# Altium PCB PCB_Motherboard.PcbDoc (part 2 of 2)
Units mm, origin at the board's own origin, x right, y up, seen from the top; angles counter-clockwise.
Board outline 110 x 216 mm, 2 copper layers (Top Layer, Bottom Layer); 105 components, 111 nets, 501 pads, 563 vias.
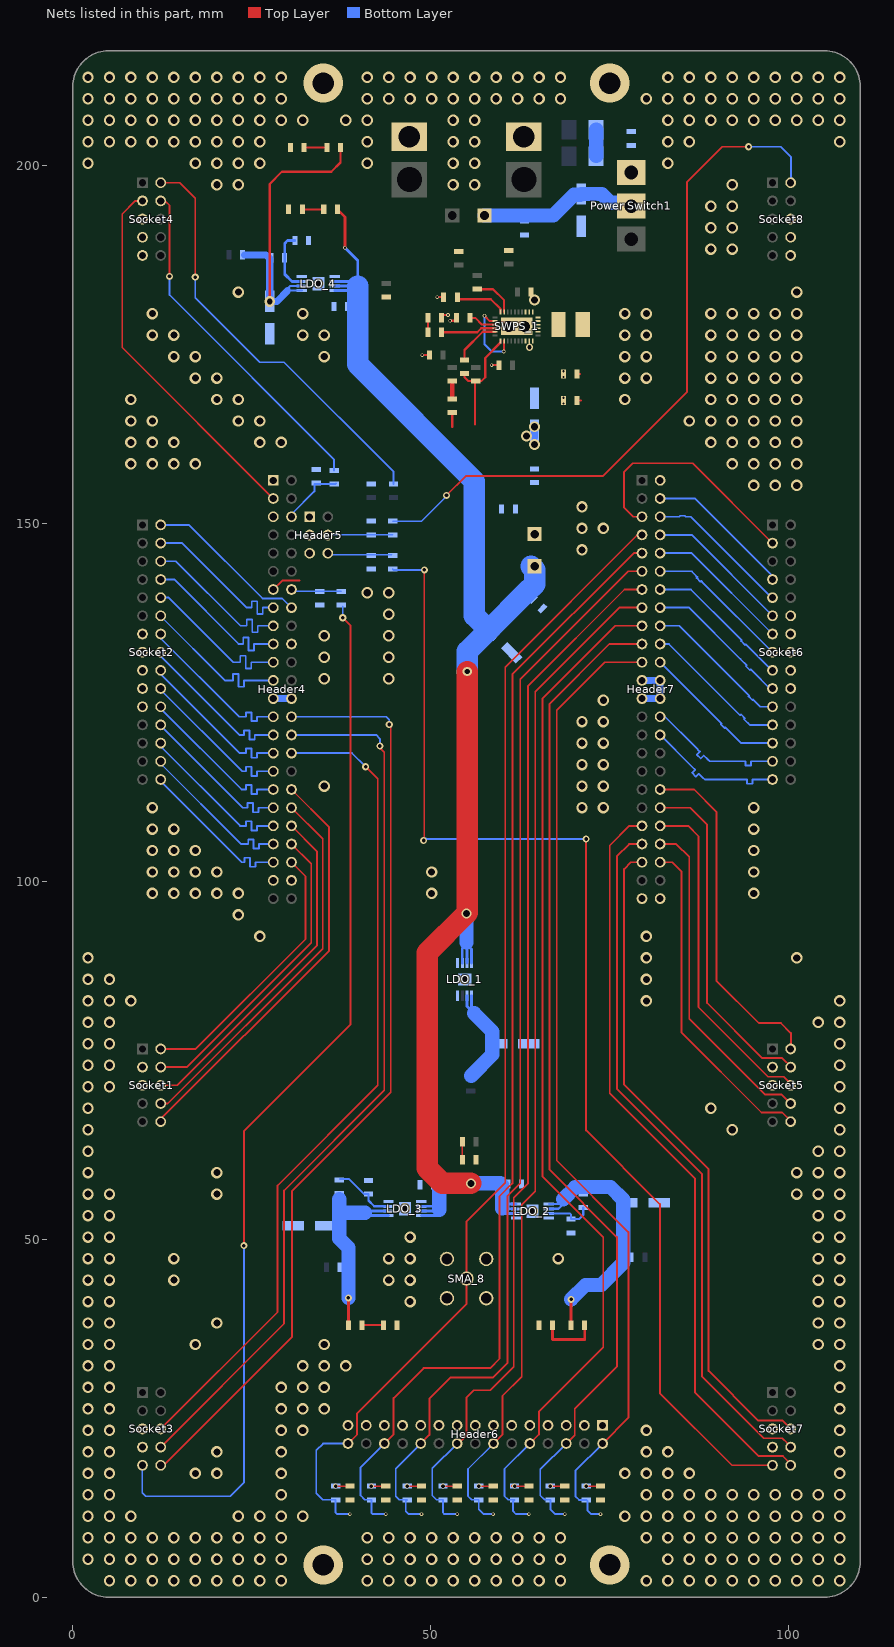
[diagram p2: the nets of this part, all layers, seen from the top]

## Via types
v1: diameter 1.6, hole 1, Top Layer to Bottom Layer, tented both sides, 493 vias
v2: diameter 0.5, hole 0.3, Top Layer to Bottom Layer, 20 vias
v3: diameter 1, hole 0.5, Top Layer to Bottom Layer, 15 vias
v4: diameter 1.4, hole 1, Top Layer to Bottom Layer, 12 vias
v5: diameter 0.7, hole 0.5, Top Layer to Bottom Layer, 8 vias
v6: diameter 1.5, hole 1, Top Layer to Bottom Layer, 6 vias
v7: diameter 5.5, hole 3, Top Layer to Bottom Layer, 4 vias
v8: diameter 2, hole 1.5, Top Layer to Bottom Layer, 2 vias
v9: diameter 1.27, hole 0.711, Top Layer to Bottom Layer, 1 vias
v10: diameter 1.5, hole 0.8, Top Layer to Bottom Layer, 1 vias
v11: diameter 1, hole 0.6, Top Layer to Bottom Layer, 1 vias

## Nets (pads, with @x,y where several pads share a name; then routed paths per layer and width w, separated by ;. In a path a pad name is that pad's centre, name@x,y a point inside that pad or via, vN(x,y) a via of type N, cw(c..) or ccw(c..) an arc to the next point about the centre after c; other vN are vias at no path point) (continued)
GND: C101.2 C102.2 C103.2 C104.2 C105.2 C106.2 C107.2 C108.2 C109.2 C110.1 C111.1 C112.1 C113.1 C114.2 C115.1 C116.1 C117.2 C119.2 C120.2 C121.1 C122.2 C123.1 C124.2 C125.1 C126.1 C127.2 C128.1 Conn_1.2 Conn_2.2 Header4.1 Header4.3 Header4.7 Header4.13 Header4.23 Header4.37 Header4.47 Header5.1 Header5.3 Header5.5 Header6.1 Header6.3 Header6.5 Header6.7 Header6.9 Header6.11 Header6.13 Header6.15 Header6.17 Header6.19 Header6.21 Header6.23 Header6.25 Header6.27 Header6.29 Header7.12 Header7.13 Header7.24 Header7.25 Header7.36 Header7.37 Header7.48 LDO_1.4 LDO_1.5 LDO_1.9 LDO_2.4 LDO_2.5 LDO_2.9 LDO_3.4 LDO_3.5 LDO_3.9 LDO_4.4 LDO_4.5 LDO_4.9 LED1.1 LED2.1 LED3.1 LED4.1 LED5.1 LED6.1 LED7.1 LED8.1 R96.2 R97.2 R98.2 R99.2 R101.1 R103.1 R105.1 R107.2 R111.2 R114.2 SMA_8.2 Socket1.3 Socket1.5 Socket2.13 Socket2.15 Socket2.17 Socket2.19 Socket2.21 Socket3.5 Socket3.7 Socket4.5 Socket4.7 Socket4.9 Socket5.3 Socket5.5 Socket6.12 Socket6.14 Socket6.16 Socket6.18 Socket6.20 Socket7.5 Socket7.7 Socket8.6 Socket8.8 Socket8.10 SWPS_1.8 SWPS_1.9 SWPS_1.10 SWPS_1.17 SWPS_1.18 SWPS_1.19 SWPS_1.33 | length 20.6
  Top Layer w0.254: Header4.7@28,140.76 29.24,142 31.7,142
  Top Layer w0.3: v2(48.8,173.5) R111.2@49.8,173.5 ; v2(50.9,181.6) R114.2@51.8,181.6 ; 51.9,179.1 v2(52.4,179.1) ; v2(52.7,178.3) 53.2,178.3 ; v2(58.5,172.1) C117.2@59.5,172.1
  Bottom Layer w0.8: v8(60.9,177.5) v8(63.1,177.5)
  Bottom Layer w1: Header4.7@27.84,140.76 Header4.7@28,140.76 ; Header4.13@28,125.52 Header4.37@30.54,125.52 ; Header7.13@79.5,125.52 Header7.37@82.04,125.52 Header7.36@82.04,128.06 Header7.12@79.5,128.06
  other v1: 5.121,2.296 8.121,2.296 11.121,2.296 14.121,2.296 17.121,2.296 20.121,2.296 23.121,2.296 26.121,2.296 29.121,2.296 41.121,2.296 44.121,2.296 47.121,2.296 50.121,2.296 53.121,2.296 56.121,2.296 59.121,2.296 62.121,2.296 65.121,2.296 68.121,2.296 80.121,2.296 83.121,2.296 86.121,2.296 89.121,2.296 92.121,2.296 95.121,2.296 98.121,2.296 101.121,2.296 104.121,2.296 107.121,2.296 2.121,5.296 5.121,5.296 8.121,5.296 11.121,5.296 14.121,5.296 17.121,5.296 20.121,5.296 23.121,5.296 26.121,5.296 29.121,5.296 41.121,5.296 44.121,5.296 47.121,5.296 50.121,5.296 53.121,5.296 56.121,5.296 59.121,5.296 62.121,5.296 65.121,5.296 68.121,5.296 83.121,5.296 86.121,5.296 89.121,5.296 92.121,5.296 95.121,5.296 98.121,5.296 101.121,5.296 104.121,5.296 107.121,5.296 2.121,8.296 5.121,8.296 8.121,8.296 11.121,8.296 14.121,8.296 17.121,8.296 20.121,8.296 23.121,8.296 26.121,8.296 29.121,8.296 41.121,8.296 44.121,8.296 47.121,8.296 50.121,8.296 53.121,8.296 56.121,8.296 59.121,8.296 62.121,8.296 65.121,8.296 68.121,8.296 80.121,8.296 83.121,8.296 86.121,8.296 89.121,8.296 92.121,8.296 95.121,8.296 98.121,8.296 101.121,8.296 104.121,8.296 107.121,8.296 2.121,11.296 5.121,11.296 8.121,11.296 23.121,11.296 26.121,11.296 29.121,11.296 32.121,11.296 77.121,11.296 80.121,11.296 83.121,11.296 86.121,11.296 89.121,11.296 92.121,11.296 95.121,11.296 98.121,11.296 101.121,11.296 104.121,11.296 107.121,11.296 2.121,14.296 5.121,14.296 29.121,14.296 80.121,14.296 83.121,14.296 86.121,14.296 89.121,14.296 92.121,14.296 95.121,14.296 98.121,14.296 101.121,14.296 104.121,14.296 107.121,14.296 2.121,17.296 5.121,17.296 17.121,17.296 20.121,17.296 29.121,17.296 77.121,17.296 80.121,17.296 83.121,17.296 86.121,17.296 107.121,17.296 2.121,20.296 5.121,20.296 20.121,20.296 29.121,20.296 80.121,20.296 83.121,20.296 107.121,20.296 2.121,23.296 5.121,23.296 29.121,23.296 32.121,23.296 80.121,23.296 107.121,23.296 2.121,26.296 5.121,26.296 29.121,26.296 32.121,26.296 35.121,26.296 107.121,26.296 2.121,29.296 5.121,29.296 29.121,29.296 32.121,29.296 35.121,29.296 107.121,29.296 2.121,32.296 5.121,32.296 32.121,32.296 35.121,32.296 38.121,32.296 107.121,32.296 2.121,35.296 5.121,35.296 17.121,35.296 35.121,35.296 104.121,35.296 107.121,35.296 2.121,38.296 5.121,38.296 20.121,38.296 104.121,38.296 107.121,38.296 2.121,41.296 5.121,41.296 47.121,41.296 104.121,41.296 107.121,41.296 2.121,44.296 5.121,44.296 14.121,44.296 44.121,44.296 47.121,44.296 104.121,44.296 107.121,44.296 2.121,47.296 5.121,47.296 14.121,47.296 44.121,47.296 47.121,47.296 67.8,47.3 104.121,47.296 107.121,47.296 2.121,50.296 5.121,50.296 47.121,50.296 104.121,50.296 107.121,50.296 2.121,53.296 5.121,53.296 104.121,53.296 107.121,53.296 2.121,56.296 5.121,56.296 20.121,56.296 101.121,56.296 104.121,56.296 107.121,56.296 2.121,59.296 20.121,59.296 101.121,59.296 104.121,59.296 107.121,59.296 2.121,62.296 104.121,62.296 107.121,62.296 2.121,65.296 92.121,65.296 107.121,65.296 2.121,68.296 89.121,68.296 107.121,68.296 2.121,71.296 5.121,71.296 107.121,71.296 2.121,74.296 5.121,74.296 107.121,74.296 2.121,77.296 5.121,77.296 107.121,77.296 2.121,80.296 5.121,80.296 104.121,80.296 107.121,80.296 2.121,83.296 5.121,83.296 8.121,83.296 80.121,83.296 107.121,83.296 2.121,86.296 5.121,86.296 80.121,86.296 2.121,89.296 80.121,89.296 101.121,89.296 26.121,92.296 80.121,92.296 23.121,95.296 11.121,98.296 14.121,98.296 17.121,98.296 20.121,98.296 23.121,98.296 50.121,98.296 95.121,98.296 11.121,101.296 14.121,101.296 17.121,101.296 20.121,101.296 50.121,101.296 95.121,101.296 11.121,104.296 14.121,104.296 17.121,104.296 95.121,104.296 11.121,107.296 14.121,107.296 95.121,107.296 11.121,110.296 71.121,110.296 74.121,110.296 95.121,110.296 35.121,113.296 71.121,113.296 74.121,113.296 71.121,116.296 74.121,116.296 71.121,119.296 74.121,119.296 71.121,122.296 74.121,122.296 74.121,125.296 35.121,128.296 44.121,128.296 35.121,131.296 44.121,131.296 35.121,134.296 44.121,134.296 44.121,137.296 41.121,140.296 44.121,140.296 71.121,146.296 71.121,149.296 74.121,149.296 71.121,152.296 95.121,155.296 98.121,155.296 101.121,155.296 8.121,158.296 11.121,158.296 14.121,158.296 17.121,158.296 92.121,158.296 95.121,158.296 98.121,158.296 101.121,158.296 8.121,161.296 11.121,161.296 14.121,161.296 26.121,161.296 29.121,161.296 89.121,161.296 92.121,161.296 95.121,161.296 98.121,161.296 101.121,161.296 8.121,164.296 11.121,164.296 23.121,164.296 26.121,164.296 86.121,164.296 89.121,164.296 92.121,164.296 95.121,164.296 98.121,164.296 101.121,164.296 8.121,167.296 20.121,167.296 23.121,167.296 77.121,167.296 89.121,167.296 92.121,167.296 95.121,167.296 98.121,167.296 101.121,167.296 17.121,170.296 20.121,170.296 77.121,170.296 80.121,170.296 89.121,170.296 92.121,170.296 95.121,170.296 98.121,170.296 101.121,170.296 14.121,173.296 17.121,173.296 35.121,173.296 77.121,173.296 80.121,173.296 89.121,173.296 92.121,173.296 95.121,173.296 98.121,173.296 101.121,173.296 11.121,176.296 14.121,176.296 32.121,176.296 35.121,176.296 77.121,176.296 80.121,176.296 89.121,176.296 92.121,176.296 95.121,176.296 98.121,176.296 101.121,176.296 11.121,179.296 32.121,179.296 77.121,179.296 80.121,179.296 89.121,179.296 92.121,179.296 95.121,179.296 98.121,179.296 101.121,179.296 23.121,182.296 101.121,182.296 89.121,188.296 92.121,188.296 89.121,191.296 92.121,191.296 89.121,194.296 92.121,194.296 20.121,197.296 23.121,197.296 53.121,197.296 56.121,197.296 92.121,197.296 2.121,200.296 17.121,200.296 20.121,200.296 23.121,200.296 26.121,200.296 41.121,200.296 53.121,200.296 56.121,200.296 83.121,200.296 2.121,203.296 5.121,203.296 8.121,203.296 11.121,203.296 14.121,203.296 17.121,203.296 20.121,203.296 23.121,203.296 26.121,203.296 41.121,203.296 53.121,203.296 56.121,203.296 83.121,203.296 86.121,203.296 107.121,203.296 2.121,206.296 5.121,206.296 8.121,206.296 11.121,206.296 14.121,206.296 17.121,206.296 20.121,206.296 23.121,206.296 26.121,206.296 29.121,206.296 32.121,206.296 38.121,206.296 41.121,206.296 53.121,206.296 56.121,206.296 83.121,206.296 86.121,206.296 89.121,206.296 92.121,206.296 95.121,206.296 98.121,206.296 101.121,206.296 104.121,206.296 107.121,206.296 2.121,209.296 5.121,209.296 8.121,209.296 11.121,209.296 14.121,209.296 17.121,209.296 20.121,209.296 23.121,209.296 26.121,209.296 29.121,209.296 41.121,209.296 44.121,209.296 47.121,209.296 50.121,209.296 53.121,209.296 56.121,209.296 59.121,209.296 62.121,209.296 65.121,209.296 68.121,209.296 80.121,209.296 83.121,209.296 86.121,209.296 89.121,209.296 92.121,209.296 95.121,209.296 98.121,209.296 101.121,209.296 104.121,209.296 107.121,209.296 2.121,212.296 5.121,212.296 8.121,212.296 11.121,212.296 14.121,212.296 17.121,212.296 20.121,212.296 23.121,212.296 26.121,212.296 29.121,212.296 41.121,212.296 44.121,212.296 47.121,212.296 50.121,212.296 53.121,212.296 56.121,212.296 59.121,212.296 62.121,212.296 65.121,212.296 68.121,212.296 83.121,212.296 86.121,212.296 89.121,212.296 92.121,212.296 95.121,212.296 98.121,212.296 101.121,212.296 104.121,212.296 107.121,212.296
  other v2: 68.55,166.75 68.55,167.55 68.55,170.45 68.55,171.25
  other v4: 64.3,53.925 46.4,54.325 54.725,86.3 34.3,183.525
  other v6: 64.475,181.2
  other v7: 35,4.5 75,4.5 35,211.5 75,211.5
  other v11: 63.8,174.6
H_ADC_CLK: Header7.39 Socket6.29 | length 20.6
  Bottom Layer w0.254: Header7.39@82.04,120.44 86.49,115.99 86.913,115.567 86.498,115.152 87.037,114.614 87.452,115.028 87.991,114.489 88.26,114.22 94.157,114.22 94.157,113.634 94.919,113.634 94.919,114.22 95.3,114.22 Socket6.29@97.73,114.22
H_ADC_D0: Header7.38 Socket6.27 | length 20.6
  Bottom Layer w0.254: Header7.38@82.04,122.98 82.72,122.98 87,118.7 87.593,118.107 87.174,117.688 87.713,117.149 88.132,117.568 88.671,117.029 88.94,116.76 93.957,116.76 93.957,116.167 94.719,116.167 94.719,116.76 95.1,116.76 Socket6.27@97.73,116.76
H_ADC_D1: Header7.35 Socket6.25 | length 20.7
  Bottom Layer w0.254: Header7.35@82.04,130.6 90.57,122.07 90.612,122.028 90.51,121.926 91.049,121.387 91.151,121.489 91.42,121.22 93.34,119.3 Socket6.25@97.73,119.3
H_ADC_D2: Header7.34 Socket6.23 | length 20.7
  Bottom Layer w0.254: Header7.34@82.04,133.14 83.26,133.14 93.1,123.3 93.213,123.187 93.332,123.306 93.871,122.767 93.752,122.648 94.291,122.109 94.56,121.84 94.919,121.84 95.3,121.84 Socket6.23@97.73,121.84
H_ADC_D3: Header7.33 Socket6.21 | length 20.6
  Bottom Layer w0.254: Header7.33@82.04,135.68 84.72,135.68 92.6,127.8 94.492,125.908 94.402,125.818 94.941,125.28 95.031,125.369 95.3,125.1 96.02,124.38 Socket6.21@97.73,124.38
H_ADC_D4: Header7.32 Socket6.19 | length 20.7
  Bottom Layer w0.254: Header7.32@82.04,138.22 86.08,138.22 93.25,131.05 94.142,130.158 94.035,130.052 94.574,129.513 94.681,129.619 94.95,129.35 97.38,126.92 Socket6.19@97.73,126.92
H_ADC_D5: Header7.31 Socket6.17 | length 21.2
  Bottom Layer w0.254: Header7.31@82.04,140.76 86.34,140.76 92.4,134.7 93.442,133.658 93.348,133.565 93.887,133.026 93.981,133.119 94.25,132.85 97.64,129.46 Socket6.17@97.73,129.46 Socket6.17@98.34,129.46
H_ADC_D6: Header7.30 Socket6.15 | length 20.7
  Bottom Layer w0.254: Header7.30@82.04,143.3 85.9,143.3 86.281,143.3 86.43,143.3 86.699,143.031 87.238,142.492 87.124,142.378 87.663,141.839 87.777,141.953 87.865,141.865 Socket6.15@97.73,132
H_ADC_D7: Header7.29 Socket6.13 | length 20.4
  Bottom Layer w0.254: Header7.29@82.04,145.84 86.43,145.84 Socket6.13@97.73,134.54
H_ADC_D8: Header7.28 Socket6.11 | length 20.4
  Bottom Layer w0.254: Header7.28@82.04,148.38 86.43,148.38 Socket6.11@97.73,137.08
H_ADC_D9: Header7.27 Socket6.9 | length 20.6
  Bottom Layer w0.254: Header7.27@82.04,150.92 84.4,150.92 84.781,150.92 84.781,151.057 85.543,151.057 85.543,150.92 86.3,150.92 97.6,139.62 Socket6.9@97.73,139.62
H_ADC_D10: Header7.26 Socket6.7 | length 20.9
  Bottom Layer w0.254: Header7.26@82.04,153.46 86.94,153.46 97.985,142.415 Socket6.7@98.24,142.16
H_ADC_OR: Header7.3 Socket6.3 | length 33.9
  Top Layer w0.254: Header7.3@79.5,150.92 78.28,150.92 77,152.2 77,157.2 78.2,158.4 86.57,158.4 Socket6.3@97.73,147.24
H_DAC_CLOCK: Header4.32 Socket2.2 | length 23.1
  Bottom Layer w0.254: Socket2.2@12.27,149.78 16.22,149.78 26.5,139.5 29.26,139.5 Header4.32@30.54,138.22
H_DAC_DB0: Header4.22 Socket2.30 | length 23.7
  Bottom Layer w0.254: Socket2.30@11.76,114.5 12.155,114.105 23.6,102.66 23.995,102.66 23.995,103.295 24.757,103.295 24.757,102.66 24.757,102.025 25.519,102.025 25.519,102.66 25.9,102.66 Header4.22@28,102.66
H_DAC_DB1: Header4.21 Socket2.28 | length 23.4
  Bottom Layer w0.254: Socket2.28@11.94,116.76 12.105,116.595 23.5,105.2 24.4,105.2 24.495,105.2 24.495,105.835 25.257,105.835 25.257,105.2 25.257,104.565 26.019,104.565 26.019,105.2 26.4,105.2 Header4.21@28,105.2
H_DAC_DB2: Header4.20 Socket2.26 | length 23.5
  Bottom Layer w0.254: Socket2.26@11.8,119.3 12.035,119.065 23.36,107.74 24.195,107.74 24.195,108.375 24.957,108.375 24.957,107.74 24.957,107.105 25.719,107.105 25.719,107.74 26.1,107.74 Header4.20@28,107.74
H_DAC_DB3: Header4.19 Socket2.24 | length 23.2
  Bottom Layer w0.254: Socket2.24@12.16,121.84 12.215,121.785 23.72,110.28 24.395,110.28 24.395,110.915 25.157,110.915 25.157,110.28 25.157,109.645 25.919,109.645 25.919,110.28 26.3,110.28 Header4.19@28,110.28
H_DAC_DB4: Header4.18 Socket2.22 | length 23.3
  Bottom Layer w0.254: Socket2.22@12.02,124.38 12.145,124.255 23.58,112.82 24.195,112.82 24.195,113.455 24.957,113.455 24.957,112.82 24.957,112.185 25.719,112.185 25.719,112.82 26.1,112.82 Header4.18@28,112.82
H_DAC_DB5: Header4.17 Socket2.20 | length 23.2
  Bottom Layer w0.254: Socket2.20@12.08,126.92 12.175,126.825 23.64,115.36 24.195,115.36 24.195,115.995 24.957,115.995 24.957,115.36 24.957,114.725 25.719,114.725 25.719,115.36 26.1,115.36 Header4.17@28,115.36
H_DAC_DB6: Header4.16 Socket2.18 | length 23.6
  Bottom Layer w0.254: Socket2.18@11.74,129.46 12.005,129.195 23.3,117.9 24.195,117.9 24.195,118.535 24.957,118.535 24.957,117.9 24.957,117.265 25.719,117.265 25.719,117.9 26.1,117.9 Header4.16@28,117.9
H_DAC_DB7: Header4.15 Socket2.16 | length 23.6
  Bottom Layer w0.254: Socket2.16@11.7,132 11.985,131.715 23.26,120.44 23.895,120.44 23.895,121.075 24.657,121.075 24.657,120.44 24.657,119.805 25.419,119.805 25.419,120.44 25.8,120.44 Header4.15@28,120.44
H_DAC_DB8: Header4.14 Socket2.14 | length 23.4
  Bottom Layer w0.254: Socket2.14@11.77,134.43 11.965,134.235 23.22,122.98 24.195,122.98 24.195,123.575 24.957,123.575 24.957,122.98 24.957,122.385 25.719,122.385 25.719,122.98 26.1,122.98 Header4.14@28,122.98
H_DAC_DB9: Header4.12 Socket2.12 | length 23.1
  Bottom Layer w0.254: Socket2.12@12.22,137.08 12.245,137.055 21.24,128.06 22.395,128.06 22.395,128.958 23.157,128.958 23.157,128.06 23.157,127.162 23.919,127.162 23.919,128.06 24.3,128.06 Header4.12@28,128.06
H_DAC_DB10: Header4.11 Socket2.10 | length 23.1
  Bottom Layer w0.254: Socket2.10@12.27,139.62 13.38,139.62 22.4,130.6 23.395,130.6 23.395,131.498 24.157,131.498 24.157,130.6 24.157,129.702 24.919,129.702 24.919,130.6 25.3,130.6 Header4.11@28,130.6
H_DAC_DB11: Header4.10 Socket2.8 | length 23.1
  Bottom Layer w0.254: Socket2.8@12.27,142.16 14.14,142.16 23.16,133.14 23.795,133.14 23.795,134.038 24.557,134.038 24.557,133.14 24.557,132.242 25.319,132.242 25.319,133.14 25.7,133.14 Header4.10@28,133.14
H_DAC_DB12: Header4.9 Socket2.6 | length 23.1
  Bottom Layer w0.254: Socket2.6@12.27,144.7 14.4,144.7 23.42,135.68 24.295,135.68 24.295,136.578 25.057,136.578 25.057,135.68 25.057,134.782 25.819,134.782 25.819,135.68 26.2,135.68 Header4.9@28,135.68
H_DAC_DB13: Header4.8 Socket2.4 | length 23.1
  Bottom Layer w0.254: Socket2.4@12.27,147.24 15.26,147.24 24.28,138.22 24.3,138.22 24.995,138.22 24.995,139.118 25.757,139.118 25.757,138.22 25.757,137.322 26.519,137.322 26.519,138.22 26.9,138.22 Header4.8@28,138.22
INPUTDETECTOR: C105.1 Header5.4 R91.1 | length 9.1
  Bottom Layer w0.254: Header5.4@35.62,148.36 35.66,148.4 C105.1@41.7,148.4 R91.1@44.7,148.4
LDO_IN: C110.2 C111.2 C112.2 C113.2 C114.1 C115.2 FB1.1 LDO_1.6 LDO_1.7 LDO_1.8 LDO_2.6 LDO_2.7 LDO_2.8 LDO_3.6 LDO_3.7 LDO_3.8 LDO_4.6 LDO_4.7 LDO_4.8 LED13.2 | length 213.1
  Top Layer w0.4: LED13.2@36.95,193.85 38,192.8 v2(38,188.5)
  Top Layer w3: v9(55.1,129.3) 55.1,95.6 v4(55,95.5) 49.5,90 49.5,59.9 51.6,57.8 v4(55.6,57.8)
  Bottom Layer w0.4: LDO_4.8@36.59,182.5 39.7,182.5 ; LDO_4.7@36.59,183.15 39.8,183.15 39.8,186.7 v2(38,188.5) ; LDO_4.6@36.59,183.8 38.9,183.8 ; LDO_3.8@48.69,53.3 51,53.3 ; LDO_3.7@48.69,53.95 51,53.95 ; LDO_3.6@48.69,54.6 51,54.6 ; LDO_1.6@54.4,88.59 54.4,90.6 55,91.2 ; LDO_1.7@55.05,88.59 55.05,91.15 ; 55.05,91.4 55.05,91.15 ; LDO_1.8@55.7,88.59 55.7,90.5 55.05,91.15 ; 60.1,54.9 LDO_2.8@61.91,54.9 ; 60.3,53.6 LDO_2.6@61.91,53.6 ; 60.35,54.25 LDO_2.7@61.91,54.25
  Bottom Layer w1: 59.7,57.8 60,57.5
  Bottom Layer w2: 51.2,54.1 51.2,57.6 51.2,57.8 v4(55.6,57.8) 59.7,57.8 ; 55,91.45 55,93.3 v4(55,95.5) ; 60,54.3 60,57.5
  Bottom Layer w3: 39.8,183.15 39.8,180.3 39.8,172.2 56.1,155.9 56.1,137.1 C114.1@57.5,135.7 ; v9(55.1,129.3) 55.1,132.1 C114.1@58.1,135.1 63.35,140.35 64.5,141.5 64.5,143.5 64.25,143.75 FB1.1@64,144
NetC106_1: C106.1 LDO_1.1 LDO_1.2 R92.2 | length 15.9
  Bottom Layer w0.4: LDO_1.2@55.05,84 55.05,82.55 55.7,81.9 ; LDO_1.1@55.7,84 55.7,81.9 ; 56.05,81.55 55.7,81.9
  Bottom Layer w2: R92.2@55.65,72.85 58.6,75.8 58.6,77.3 58.6,79 56.05,81.55
NetC107_1: C107.1 LDO_2.1 LDO_2.2 LED10.2 R93.2 R100.2 | length 35.4
  Top Layer w0.4: LED10.2@69.6,38 v3(69.6,41.6)
  Bottom Layer w0.3: LDO_2.2@66.5,54.25 67.85,54.25 68.35,54.75 ; LDO_2.1@66.5,54.9 68.2,54.9
  Bottom Layer w2: 68.5,55.6 70.2,57.3 71.3,57.3 75.1,57.3 76.9,55.5 76.9,55.1 76.9,47.5 76.9,46.7 73.8,43.6 71.6,43.6 v3(69.6,41.6)
NetC108_1: C108.1 LDO_3.1 LDO_3.2 LED11.2 R94.2 R102.2 | length 28.9
  Top Layer w0.4: LED11.2@38.5,38 v3(38.5,41.8)
  Bottom Layer w0.4: 40.5,53.3 LDO_3.1@44.1,53.3 ; 40.55,53.95 LDO_3.2@44.1,53.95
  Bottom Layer w2: 37.2,55.6 37.2,53.7 ; v3(38.5,41.8) 38.5,46.1 38.5,48.8 37.2,50.1 37.2,51.9 37.2,53.7 ; 40.8,53.7 37.2,53.7
NetC109_1: C109.1 LDO_4.1 LDO_4.2 LED12.2 R95.2 R104.2 | length 47.3
  Top Layer w0.3: v10(27.5,181) 27.5,197.4 29.2,199.1 36.1,199.1 37.4,200.4 LED12.2@37.4,202.5 LED12.2@37.4,202.9
  Bottom Layer w0.3: LDO_4.1@32,182.5 30,182.5 30,182.8 30.35,183.15 LDO_4.2@32,183.15
  Bottom Layer w1: R95.2@24,187.5 27,187.5 27.5,187 v10(27.5,181) 28.5,181 30,182.5
NetC116_2: C116.2 FB1.2 R112.1
NetC121_2: C121.2 R113.1 | length 2
  Top Layer w0.3: R113.1@49.6,176.7 C121.2@49.6,178.7
NetC123_2: C123.2 SWPS_1.29 | length 3.9
  Top Layer w0.3: C123.2@55.5,178.7 56.2,178.7 57.15,177.75 SWPS_1.29@59,177.75
NetC126_2: "Power Switch1.2" C126.2 C127.1 FB2.2 | length 22.4
  Bottom Layer w2: FB2.2@57.5,193 63.1,193 67.1,193 70,195.9 70.9,195.9 C127.1@71,196 73.9,196 75.1,194.8 77.5,194.8 78,194.3
NetD1_1: D1.1 D2.1 R116.1 | length 3.7
  Bottom Layer w2: D2.1@73.1,201.3 D1.1@73.1,205
NetHeader4_34: Header4.34
NetLDO_2_3: LDO_2.3 R100.1 R101.2 | length 6.7
  Bottom Layer w0.3: LDO_2.3@66.5,53.6 69.4,53.6 69.6,53.4 R101.2@69.6,52.8 70.7,52.8 71.3,53.4 R100.1@71.3,54.4
NetLDO_3_3: LDO_3.3 R102.1 R103.2 | length 8.9
  Bottom Layer w0.3: R102.1@37.3,58.4 38.6,58.4 40.7,56.3 R103.2@41.3,56.3 41.3,55.4 42.1,54.6 LDO_3.3@44.1,54.6
NetLDO_4_3: LDO_4.3 R104.1 R105.2 | length 8.7
  Bottom Layer w0.4: R105.2@31,189.5 30,189.5 29.6,189.1 R104.1@29.6,187.1 29.6,184.8 30.6,183.8 LDO_4.3@32,183.8
NetLED1_2: LED1.2 R82.2 | length 2
  Top Layer w0.254: v5(36.707,15.499) LED1.2@38.707,15.499
NetLED2_2: LED2.2 R83.2 | length 2
  Top Layer w0.254: v5(41.707,15.499) LED2.2@43.707,15.499
NetLED3_2: LED3.2 R84.2 | length 2
  Top Layer w0.254: v5(46.707,15.499) LED3.2@48.707,15.499
NetLED4_2: LED4.2 R85.2 | length 2
  Top Layer w0.254: v5(51.707,15.499) LED4.2@53.707,15.499
NetLED5_2: LED5.2 R86.2 | length 2
  Top Layer w0.254: v5(56.707,15.499) LED5.2@58.707,15.499
NetLED6_2: LED6.2 R87.2 | length 2.7
  Top Layer w0.254: LED6.2@63.707,15.499 v5(61.707,15.499) v5@61.507,15.499 ; v5@61.507,15.499 61.307,15.499 61.407,15.599 v5@61.507,15.499
NetLED7_2: LED7.2 R88.2 | length 2
  Top Layer w0.254: v5(66.707,15.499) LED7.2@68.707,15.499
NetLED8_2: LED8.2 R89.2 | length 2
  Top Layer w0.254: v5(71.707,15.499) LED8.2@73.707,15.499
NetLED9_1: LED9.1 R96.1 | length 2.5
  Top Layer w0.254: R96.1@54.4,61.1 LED9.1@54.4,63.6
NetLED10_1: LED10.1 R97.1 | length 8.5
  Top Layer w0.4: R97.1@67,38 67,36 71.5,36 LED10.1@71.5,38
NetLED11_1: LED11.1 R98.1 | length 3
  Top Layer w0.3: LED11.1@40.4,38 R98.1@43.4,38
NetLED12_1: LED12.1 R99.1 | length 3.2
  Top Layer w0.3: R99.1@32.3,202.5 LED12.1@35.5,202.5
NetLED13_1: LED13.1 R107.1 | length 3
  Top Layer w0.254: R107.1@32.05,193.85 LED13.1@35.05,193.85
"NetPower Switch1_1": "Power Switch1.1" R116.2 | length 1
  Bottom Layer w1: 77,199 78,199
NetR79_2: R79.2 Socket3.9 | length 148.2
  Top Layer w0.254: v3@23.9,48.9 v3(23.9,49.1) 23.9,65.1 38.8,80 38.8,135.7 v3(37.7,136.8)
  Bottom Layer w0.254: Socket3.9@9.7,18.42 9.7,14.6 10.2,14.1 22,14.1 23.9,16 v3(23.9,49.1) ; v3(37.7,136.8) R79.2@37.7,138.4
NetR80_1: R80.1 Socket4.2 | length 59.1
  Top Layer w0.254: Socket4.2@12.27,197.58 14.92,197.58 17.1,195.4 v3(17.1,184.4)
  Bottom Layer w0.254: v3(17.1,184.4) 17.1,181.5 26.1,172.5 29.5,172.5 44.8,157.2 R80.1@44.8,155.5
NetR81_1: R81.1 Socket4.4 | length 48
  Top Layer w0.254: Socket4.4@12.27,195.04 12.86,195.04 13.5,194.4 v3(13.5,184.5)
  Bottom Layer w0.254: v3(13.5,184.5) 13.5,181.9 36.5,158.9 R81.1@36.5,157.4
NetR90_2: R90.2 Socket7.9 | length 166.7
  Top Layer w0.254: v3(49,105.7) 49.1,105.8 v3(49.1,143.5) ; v3(71.7,105.9) 71.7,65.2 82,54.9 82,28.5 92.08,18.42 Socket7.9@97.73,18.42
  Bottom Layer w0.254: R90.2@44.7,143.6 44.8,143.5 v3(49.1,143.5) ; v3(49,105.7) 49.3,106 49.4,105.9 v3(71.7,105.9)
NetR91_2: R91.2 Socket8.2 | length 98.7
  Top Layer w0.254: v3(52.2,153.9) 54.9,156.6 74,156.6 85.8,168.4 85.8,197.7 90.7,202.6 v3(94.4,202.6)
  Bottom Layer w0.254: R91.2@44.7,150.3 48.7,150.3 52.2,153.8 v3(52.2,153.9) ; v3(94.4,202.6) 98.9,202.6 100.3,201.2 Socket8.2@100.3,197.58
NetR109_2: R109.2 R110.1 | length 2
  Top Layer w0.6: R110.1@53,167.4 53,169.4
NetR113_2: R113.2 SWPS_1.30 | length 7.7
  Top Layer w0.3: R113.2@51.5,176.7 56.5,176.7 57.05,177.25 SWPS_1.30@59,177.25
NetR114_1: R114.1 SWPS_1.26 | length 7.3
  Top Layer w0.3: R114.1@53.5,181.3 53.7,181.3 58.4,181.3 59.75,179.95 SWPS_1.26@59.75,179.5
NetR115_2: R115.2 SWPS_1.25 | length 6
  Top Layer w0.3: R115.2@56.5,182.7 58.7,182.7 60.25,181.15 SWPS_1.25@60.25,179.5
PAM_BIAS: Header4.2 Socket4.3 | length 52.1
  Top Layer w0.254: Socket4.3@9.73,195.04 8.73,195.04 6.9,193.21 6.9,174.56 Header4.2@28,153.46
PG: R108.1 SWPS_1.31 | length 6.5
  Top Layer w0.3: R108.1@54.7,173.1 54.7,174.2 57.25,176.75 SWPS_1.31@59,176.75
RWP_DETECTOR: C103.1 Header4.27 R81.2 | length 8.9
  Bottom Layer w0.254: Header4.27@30.54,150.92 30.54,151.24 33.75,154.45 33.75,155.5 34,155.5 R81.2@36.5,155.5 36.7,155.5 R81.2@36.75,155.55
RX_ATT_LE: Header7.20 Socket7.10 | length 104.6
  Top Layer w0.254: Header7.20@79.5,107.74 77.74,107.74 75,105 75,70.4 86.9,58.5 86.9,28.6 95.8,19.7 99.2,19.7 Socket7.10@100.375,18.525
RX_ATT_SCLK: Header7.22 Socket7.6 | length 92.7
  Top Layer w0.254: Header7.22@79.5,102.66 77.96,102.66 77,101.7 77,71.6 88.8,59.8 88.8,31.6 95.7,24.7 99.07,24.7 Socket7.6@100.27,23.5
RX_ATT_SI: Header7.21 Socket7.8 | length 97.6
  Top Layer w0.254: Header7.21@79.5,105.2 77.7,105.2 76,103.5 76,71 87.9,59.1 87.9,30.8 96.5,22.2 99.1,22.2 Socket7.8@99.835,21.465
RX_AUX_REF_CLK: Header7.42 Socket5.2 | length 48.4
  Top Layer w0.254: Header7.42@82.04,112.82 86.78,112.82 89.9,109.7 89.9,86.1 95.8,80.2 98.9,80.2 100.3,78.8 Socket5.2@100.3,76.58
RX_SYTH_DATA: Header7.45 Socket5.8 | length 46
  Top Layer w0.254: Header7.45@82.04,105.2 84.3,105.2 86.1,103.4 86.1,80.8 96.7,70.2 99,70.2 Socket5.8@99.95,69.25
RX_SYTH_LE: Header7.46 Socket5.10 | length 46.5
  Top Layer w0.254: Header7.46@82.04,102.66 83.74,102.66 85,101.4 85,78.9 96.2,67.7 99.1,67.7 100.325,66.475 Socket5.10@100.38,66.42
RX_SYTH_MUX: Header7.43 Socket5.4 | length 47.9
  Top Layer w0.254: Header7.43@82.04,110.28 86.22,110.28 88.6,107.9 88.6,83 96.3,75.3 99.1,75.3 Socket5.4@100.315,74.085
RX_SYTH_SCLK: Header7.44 Socket5.6 | length 47.1
  Top Layer w0.254: Header7.44@82.04,107.74 85.96,107.74 87.4,106.3 87.4,82.4 97.1,72.7 99.3,72.7 Socket5.6@100.27,71.73
RXDETECTOR: C104.1 Header5.6 R90.1 | length 9
  Bottom Layer w0.254: Header5.6@35.62,145.82 35.84,145.6 41.7,145.6 R90.1@44.5,145.6
SPREADSPECTRUM: SWPS_1.2 SWPS_1.28 | length 10.4
  Top Layer w0.3: v2(57.5,179) 58.25,178.25 SWPS_1.28@59,178.25 ; v2(60.2,174) 60.25,174.05 SWPS_1.2@60.25,175.5
  Bottom Layer w0.3: v2(57.5,179) 57.5,175 58.5,174 v2(60.2,174)
TP_0: Header6.30 Header7.4 R82.1 SMA_8.1 | length 162.1
  Top Layer w0.254: Header6.30@38.44,21.46 39.7,22.72 39.7,25.7 55,41 SMA_8.1@55,44.5 55,52.5 60.4,57.9 60.4,129.9 78.88,148.38 Header7.4@79.5,148.38
  Bottom Layer w0.254: Header6.30@38.44,21.46 34.96,21.46 34,20.5 34,14.5 34.901,13.599 R82.1@36.707,13.599 36.707,11.793 36.901,11.599 v2(38.707,11.599)
TP_1: Header6.26 Header7.5 R83.1 | length 159.7
  Top Layer w0.254: Header6.26@43.52,21.46 44.8,22.74 44.8,27.8 49,32 58.3,32 59.6,33.3 59.6,56 61.4,57.8 61.4,128.9 78.34,145.84 Header7.5@79.5,145.84
  Bottom Layer w0.254: Header6.26@43.52,21.46 40.2,18.14 40.2,14.2 40.801,13.599 R83.1@41.707,13.599 41.707,11.793 41.901,11.599 v2(43.707,11.599)
TP_2: Header6.22 Header7.6 R84.1 | length 153.9
  Top Layer w0.254: Header6.22@48.6,21.46 49.8,22.66 49.8,27.7 52.8,30.7 58.7,30.7 60.7,32.7 60.7,56 62.5,57.8 62.5,128.2 77.6,143.3 Header7.6@79.5,143.3
  Bottom Layer w0.254: Header6.22@48.6,21.46 45.1,17.96 45.1,14.1 45.601,13.599 R84.1@46.707,13.599 46.5,13.392 46.5,12 46.901,11.599 v2(48.707,11.599)
TP_3: Header6.18 Header7.7 R85.1 | length 147.2
  Top Layer w0.254: Header6.18@53.68,21.46 53.86,21.46 55,22.6 55,27.9 56,28.9 58.3,28.9 61.6,32.2 61.6,55.8 63.6,57.8 63.6,127.3 77.06,140.76 Header7.7@79.5,140.76
  Bottom Layer w0.254: Header6.18@53.68,21.46 50.2,17.98 50.2,14.2 50.801,13.599 R85.1@51.707,13.599 51.707,11.793 51.901,11.599 v2(53.707,11.599)
TP_4: Header6.14 Header7.8 R86.1 | length 141.4
  Top Layer w0.254: Header6.14@58.76,21.46 60,22.7 60,28.1 62.7,30.8 62.7,54.8 64.6,56.7 64.6,126.5 76.32,138.22 Header7.8@79.5,138.22
  Bottom Layer w0.254: v2(58.707,11.599) 57.401,11.599 56.707,12.293 R86.1@56.707,13.599 55.701,13.599 55.2,14.1 55.2,17.9 Header6.14@58.76,21.46
TP_5: Header6.10 Header7.9 R87.1 | length 144.4
  Top Layer w0.254: Header6.10@63.84,21.46 65.1,22.72 65.1,25.9 74.1,34.9 74.1,50.3 65.6,58.8 65.6,125.5 75.78,135.68 Header7.9@79.5,135.68
  Bottom Layer w0.254: v2(63.707,11.599) 61.901,11.599 61.5,12 61.5,13.392 R87.1@61.707,13.599 60.801,13.599 60.3,14.1 60.3,17.92 Header6.10@63.84,21.46
TP_6: Header6.6 Header7.10 R88.1 | length 140.5
  Top Layer w0.254: Header6.6@68.92,21.46 70.1,22.64 70.1,26.3 76,32.2 76,50.3 66.6,59.7 66.6,124.8 74.94,133.14 Header7.10@79.5,133.14
  Bottom Layer w0.254: v2(68.707,11.599) 67.401,11.599 66.707,12.293 R88.1@66.707,13.599 65.901,13.599 65.3,14.2 65.3,17.84 Header6.6@68.92,21.46
TP_7: Header6.2 Header7.11 R89.1 | length 137
  Top Layer w0.254: Header6.2@74,21.46 77.6,25.06 77.6,51 67.6,61 67.6,123.9 74.3,130.6 Header7.11@79.5,130.6
  Bottom Layer w0.254: v2(73.707,11.599) 72.401,11.599 71.901,12.099 71.901,13.422 R89.1@71.727,13.595 70.705,13.595 70.2,14.1 70.2,17.66 Header6.2@74,21.46
TX_ATT_LE: Header4.38 Socket3.10 | length 131.6
  Top Layer w0.254: Socket3.10@12.27,18.42 12.72,18.42 30.6,36.3 30.6,56.7 44.4,70.5 44.4,121.7 v3(44.2,121.9)
  Bottom Layer w0.254: Header4.38@30.54,122.98 43.8,122.98 44.2,122.58 v3(44.2,121.9)
TX_ATT_SCLK: Header4.40 Socket3.6 | length 116.9
  Top Layer w0.254: Socket3.6@12.27,23.5 28.6,39.83 28.6,57.5 42.6,71.5 42.6,114.3 v3(40.9,116)
  Bottom Layer w0.254: Header4.40@30.54,117.9 39,117.9 v3(40.9,116)
TX_ATT_SI: Header4.39 Socket3.8 | length 124.3
  Top Layer w0.254: Socket3.8@12.27,20.96 29.5,38.19 29.5,56.8 43.5,70.8 43.5,118 v3@43,118.5
  Bottom Layer w0.254: Header4.39@30.54,120.44 42.36,120.44 42.9,119.9 v3(42.9,118.9)
TX_AUX_REF_CLK: Header4.46 Socket1.2 | length 38.1
  Top Layer w0.254: Socket1.2@12.27,76.58 17.18,76.58 32.5,91.9 32.5,100.7 Header4.46@30.54,102.66
TX_SYTH_DATA: Header4.43 Socket1.8 | length 53.1
  Top Layer w0.254: Socket1.8@12.27,68.96 13.26,68.96 34.9,90.6 34.9,105.92 Header4.43@30.54,110.28
TX_SYTH_LE: Header4.42 Socket1.10 | length 58.5
  Top Layer w0.254: Socket1.10@11.92,66.42 12.095,66.595 35.8,90.3 35.8,107.56 Header4.42@30.54,112.82
TX_SYTH_MUX: Header4.45 Socket1.4 | length 43.2
  Top Layer w0.254: Socket1.4@12.27,74.04 15.94,74.04 33.3,91.4 33.3,102.44 Header4.45@30.54,105.2
TX_SYTH_SCLK: Header4.44 Socket1.6 | length 48.1
  Top Layer w0.254: Socket1.6@12.27,71.5 14.6,71.5 34.1,91 34.1,104.18 Header4.44@30.54,107.74
TXDETECTOR: C101.1 Header4.31 R79.1 | length 7.1
  Bottom Layer w0.254: Header4.31@30.54,140.76 30.8,140.5 C101.1@34.5,140.5 R79.1@37.5,140.5
VOUT_6V: C118.2 C119.1 C120.1 C122.1 L23.1 R106.2 R108.2 R110.2 R112.2 SWPS_1.1 | length 20.3
  Top Layer w0.3: 53,163.5 R110.2@53,165.5 ; R108.2@54.7,170.9 54.7,170.4 55.225,169.875 C118.2@56.2,169.875 ; 56.2,163.8 C118.2@56.2,169.875 ; C118.2@56.275,169.875 C118.2@56.2,169.875 ; SWPS_1.1@59.75,175.5 59.75,175.25 57.6,173.1 57.6,170.4 57.1,169.9 C118.2@56.3,169.9 56.2,169.9 C118.2@56.2,169.875 ; C119.1@70.45,167.15 70.95,167.15 ; C120.1@70.45,170.85 C120.1@70.8,170.85
  Bottom Layer w1: C122.1@64.5,162 64.5,162.2 C122.1@64.5,163 v6(64.5,163.5)
  other v6: 64.5,161 63.38,162.2
VOUT_SW: L23.2 SWPS_1.12 SWPS_1.13 SWPS_1.14 SWPS_1.15 SWPS_1.16
pads on no net: "Power Switch1.3" Header4.4 Header4.24 Header4.25 Header4.26 Header4.28 Header4.29 Header4.30 Header4.33 Header4.35 Header4.36 Header4.41 Header4.48 Header6.4 Header6.8 Header6.12 Header6.16 Header6.20 Header6.24 Header6.28 Header7.1 Header7.14 Header7.15 Header7.16 Header7.17 Header7.18 Header7.19 Header7.23 Header7.40 Header7.41 Header7.47 Socket2.1 Socket2.29 Socket6.1 Socket6.10 Socket6.22 Socket8.4 SWPS_1.3 SWPS_1.7 SWPS_1.11 SWPS_1.20 SWPS_1.24 SWPS_1.27

## Polygon pours and split planes (outlines as drawn)
GND on Top Layer "TopGND" (solid, remove dead copper, pour order 11): 0,5 0,211 cw(c5,211) 5,216 105,216 cw(c105,211) 110,211 110,5 cw(c105,5) 105,0 5,0 cw(c5,5)
GND on Bottom Layer "BotGND" (solid, remove dead copper, pour order 10): 0,5 0,211 cw(c5,211) 5,216 105,216 cw(c105,211) 110,211 110,5 cw(c105,5) 105,0 5,0 cw(c5,5)
no net on Bottom Solder "SolderMask" (solid): 0,5 ccw(c5,5) 5,0 105,0 ccw(c105,5) 110,5 110,211 ccw(c105,211) 105,216 5,216 ccw(c5,211) 0,211

## Other copper
Top Layer:
  rectangle net FPGA_POWER: 43,183.5 46.5,195.7
  rectangle net VOUT_6V: 43,163.5 46.5,181.5
  rectangle net 19V: 61.6,171.15 64.5,173.05
  rectangle net VOUT_6V: 43,160.1 72,164
  region net GND: 64.375,175.3 63.125,175.3 63.125,174 64.375,174
  region net VOUT_6V: 74.2,160.1 74.2,179.4 70.25,179.4 70.25,160.1
  rectangle net GND: 63.125,179.7 65.6,183
  rectangle net 19V: 52.7,184.4 64.95,186.3
  rectangle net 19V: 61.125,171.8 62.375,175.2
  rectangle net VOUT_SW: 65.3,176.6 68,178.9
  rectangle net 19V: 61.125,179.7 62.375,184.7
  rectangle net TP_6: 67.707,10.599 69.707,12.099
  rectangle net TP_7: 72.707,10.599 74.707,12.099
  rectangle net TP_4: 57.707,10.599 59.707,12.099
  rectangle net TP_5: 62.707,10.599 64.707,12.099
  rectangle net TP_2: 47.707,10.599 49.707,12.099
  rectangle net TP_3: 52.707,10.599 54.707,12.099
  rectangle net TP_1: 42.707,10.599 44.707,12.099
  rectangle net TP_0: 37.707,10.599 39.707,12.099
  pour cut-out: 45,184.5 45,164 59,164 70.004,164 70,184.5
  pour cut-out: 10,114 22.5,101.5 29,101.5 29,137 30.646,138.646 30.5,139 29,140.5 18.5,151 10,151
  pour cut-out: 81,154.5 81,119.5 88.5,112 100,112 100,143 99.5,143.5 98.5,143.5 98,144 87.5,154.5
Bottom Layer:
  rectangle net NetC116_2: 61.8,147.4 67,155.6
  rectangle net VOUT_6V: 61.8,157.6 67,164
  rectangle net NetD1_1: 73.7,204.4 79,206.5
  rectangle net "NetPower Switch1_1": 75.5,199.7 80.5,203
  rectangle net 3.3V: 51.5,64.3 58.4,70.8
  rectangle net GND: 59.6,175.9 64.6,179
  pour cut-out: 10,114 22.5,101.5 29,101.5 29,137 30.646,138.646 30.229,139.271 18.5,151 10,151
  pour cut-out: 81,154.5 81,119.5 88.5,112 100,112 100,143 99.5,143.5 98.5,143.5 98,144 87.5,154.5

## Silkscreen, mask and mechanical layers (free items; w line width, h text height)
Top Overlay:
  text "6V Ok" at 25,196.5 h2
Bottom Overlay:
  text "Designed by Kolos Koblasz" at 68.8,27.9 h1
  text "Designed by Kolos Koblasz" at 18.2,-39.7 h1
Top Solder:
  rectangle: 43,181 46.5,181.501
  rectangle: 43,183.5 46.5,184.001
  rectangle: 37.707,10.599 39.707,12.099
  rectangle: 42.707,10.599 44.707,12.099
  rectangle: 47.707,10.599 49.707,12.099
  rectangle: 52.707,10.599 54.707,12.099
  rectangle: 57.707,10.599 59.707,12.099
  rectangle: 62.707,10.599 64.707,12.099
  rectangle: 67.707,10.599 69.707,12.099
  rectangle: 72.707,10.599 74.707,12.099
  region: 0,0 2,0 2,215 0,215
  region: 108,0 110,0 110,215 108,215
Bottom Solder:
  rectangle: 61.8,155.1 66.993,155.601
  rectangle: 61.807,157.599 67,158.1
  pour cut-out: 6,13 ccw(c11,13) 11,8 99,8 ccw(c99,13) 104,13 104,203 ccw(c99,203) 99,208 11,208 ccw(c11,203) 6,203
Mechanical 1:
  the board outline again, w0.1
Mechanical 2:
  lines w0.1: 2,0 2,216 ; 23,0 23,216 ; 87,0 87,216 ; 108,0 108,216 ; -10,-7.5 ccw(c-5,-7.5) -5,-12.5 115,-12.5 ccw(c115,-7.5) 120,-7.5 120,223.5 ccw(c115,223.5) 115,228.5 -5,228.5 ccw(c-5,223.5) -10,223.5 -10,-7.5 ; 6,13 ccw(c11,13) 11,8 99,8 ccw(c99,13) 104,13 104,203 ccw(c99,203) 99,208 11,208 ccw(c11,203) 6,203 6,13